# EAGLE board top_block_v12 (EAGLE 9.7.0)
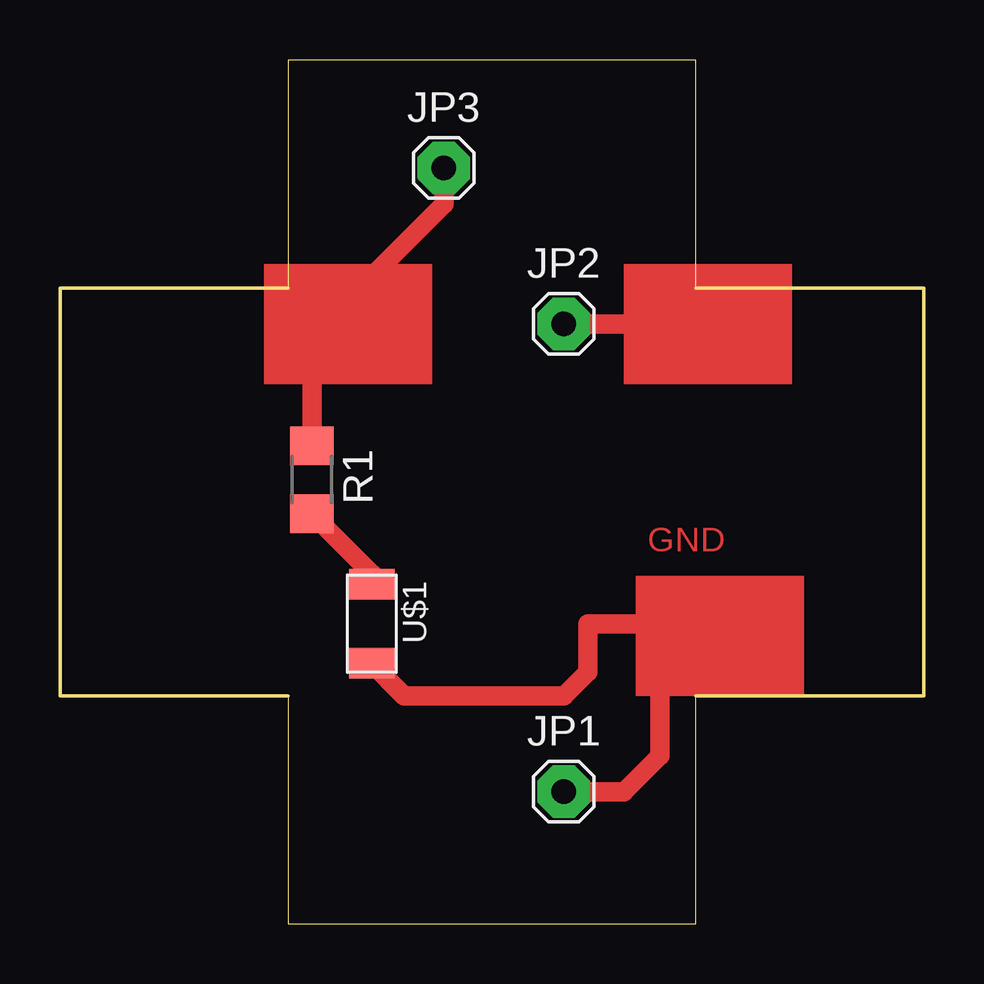
[diagram p0: board, top side]

Size 36 x 36 mm. Coordinates in mm from the lower left corner, seen from the top.
Outline: 9.5,0 26.5,0 26.5,9.5 36,9.5 36,26.5 26.5,26.5 26.5,36 9.5,36 9.5,26.5 0,26.5 0,9.5 9.5,9.5 9.5,0
Copper layers (1*16): Top 0.035mm / dielectric 1.5mm / Bottom 0.035mm
Design rules "Fusion Electronics Design Rules": minimum track width 32mil, minimum drill 0.35mm, track to track 16mil, track to pad 16mil, pad to pad 16mil, via to via 16mil, smd to smd 16mil, copper to edge 40mil, drill to drill 6mil, minimum pad ring 10mil, minimum via ring 8mil, stop-mask expansion 4mil, vias tented up to drill 9999mil, thermal gap 10mil

## Footprints (pad centres in the part's own frame; a part is rotated, then mirrored left to right if it is on the bottom)
1X01 = drill 1.016 pad 2.184 octagon: 1 0,0
R1206 = smd 1.6 x 1.803: 1 -1.422,0; 2 1.422,0
LED1206FAB = smd 1.27 x 1.905: 1 -1.651,0; 2 1.651,0

## Placement (x,y rotation side)
JP1  PINHD-1X1  [1X01]  21,5.5 0 top
JP2  PINHD-1X1  [1X01]  21,25 0 top
JP3  PINHD-1X1  [1X01]  16,31.5 0 top
R1  [R1206]  10.5,18.5 270 top
U$1  LEDFAB1206  [LED1206FAB]  13,12.5 270 top

## Library data of the parts
JP1-JP3 = Connector; CATEGORY: Connectors; DESCRIPTION: Header-Straight-1 Position; PACKAGE_TYPE: Through Hole; PITCH: 0.100" (2.54mm); SUBCATEGORY: Headers; TYPE: Male Pins
R1 U$1 = fab

## Nets
N$1: R1.2 U$1.1
N$2: U$1.2
N$3: R1.1
N$4: JP1.1
N$5: JP2.1
N$6: JP3.1

## Tracks (layer width: path | path; a pad name or v marks a point on that pad's centre or on a via)
N$1
  Top 0.813: R1.2 13,14.58 U$1.1
N$2
  Top 0.813: U$1.2 14.35,9.5 21,9.5 22,10.5 22,12.5 26,12.5
N$3
  Top 0.813: R1.1 10.5,24
N$4
  Top 0.813: JP1.1 23.5,5.5 25,7 25,10
N$5
  Top 0.813: JP2.1 25.5,25 26,24.5
N$6
  Top 0.813: JP3.1 16,30 10.5,24.5
(copper drawn outside any net)
  shapes: Top area x3

## Text on the board
Top: GND